# Altium PCB OUTDATED - motordriver-v6.3.PcbDoc (part 2 of 2)
Units mil, origin at the board's own origin, x right, y up, seen from the top; angles counter-clockwise.
Board outline 1181.1 x 2362.2 mil, 4 copper layers (TOP, GND, POWER, BOT), stack 23.756 mil thick; 171 components, 78 nets, 481 pads, 238 vias.
Unrouted connection lines stored in the file: 109.
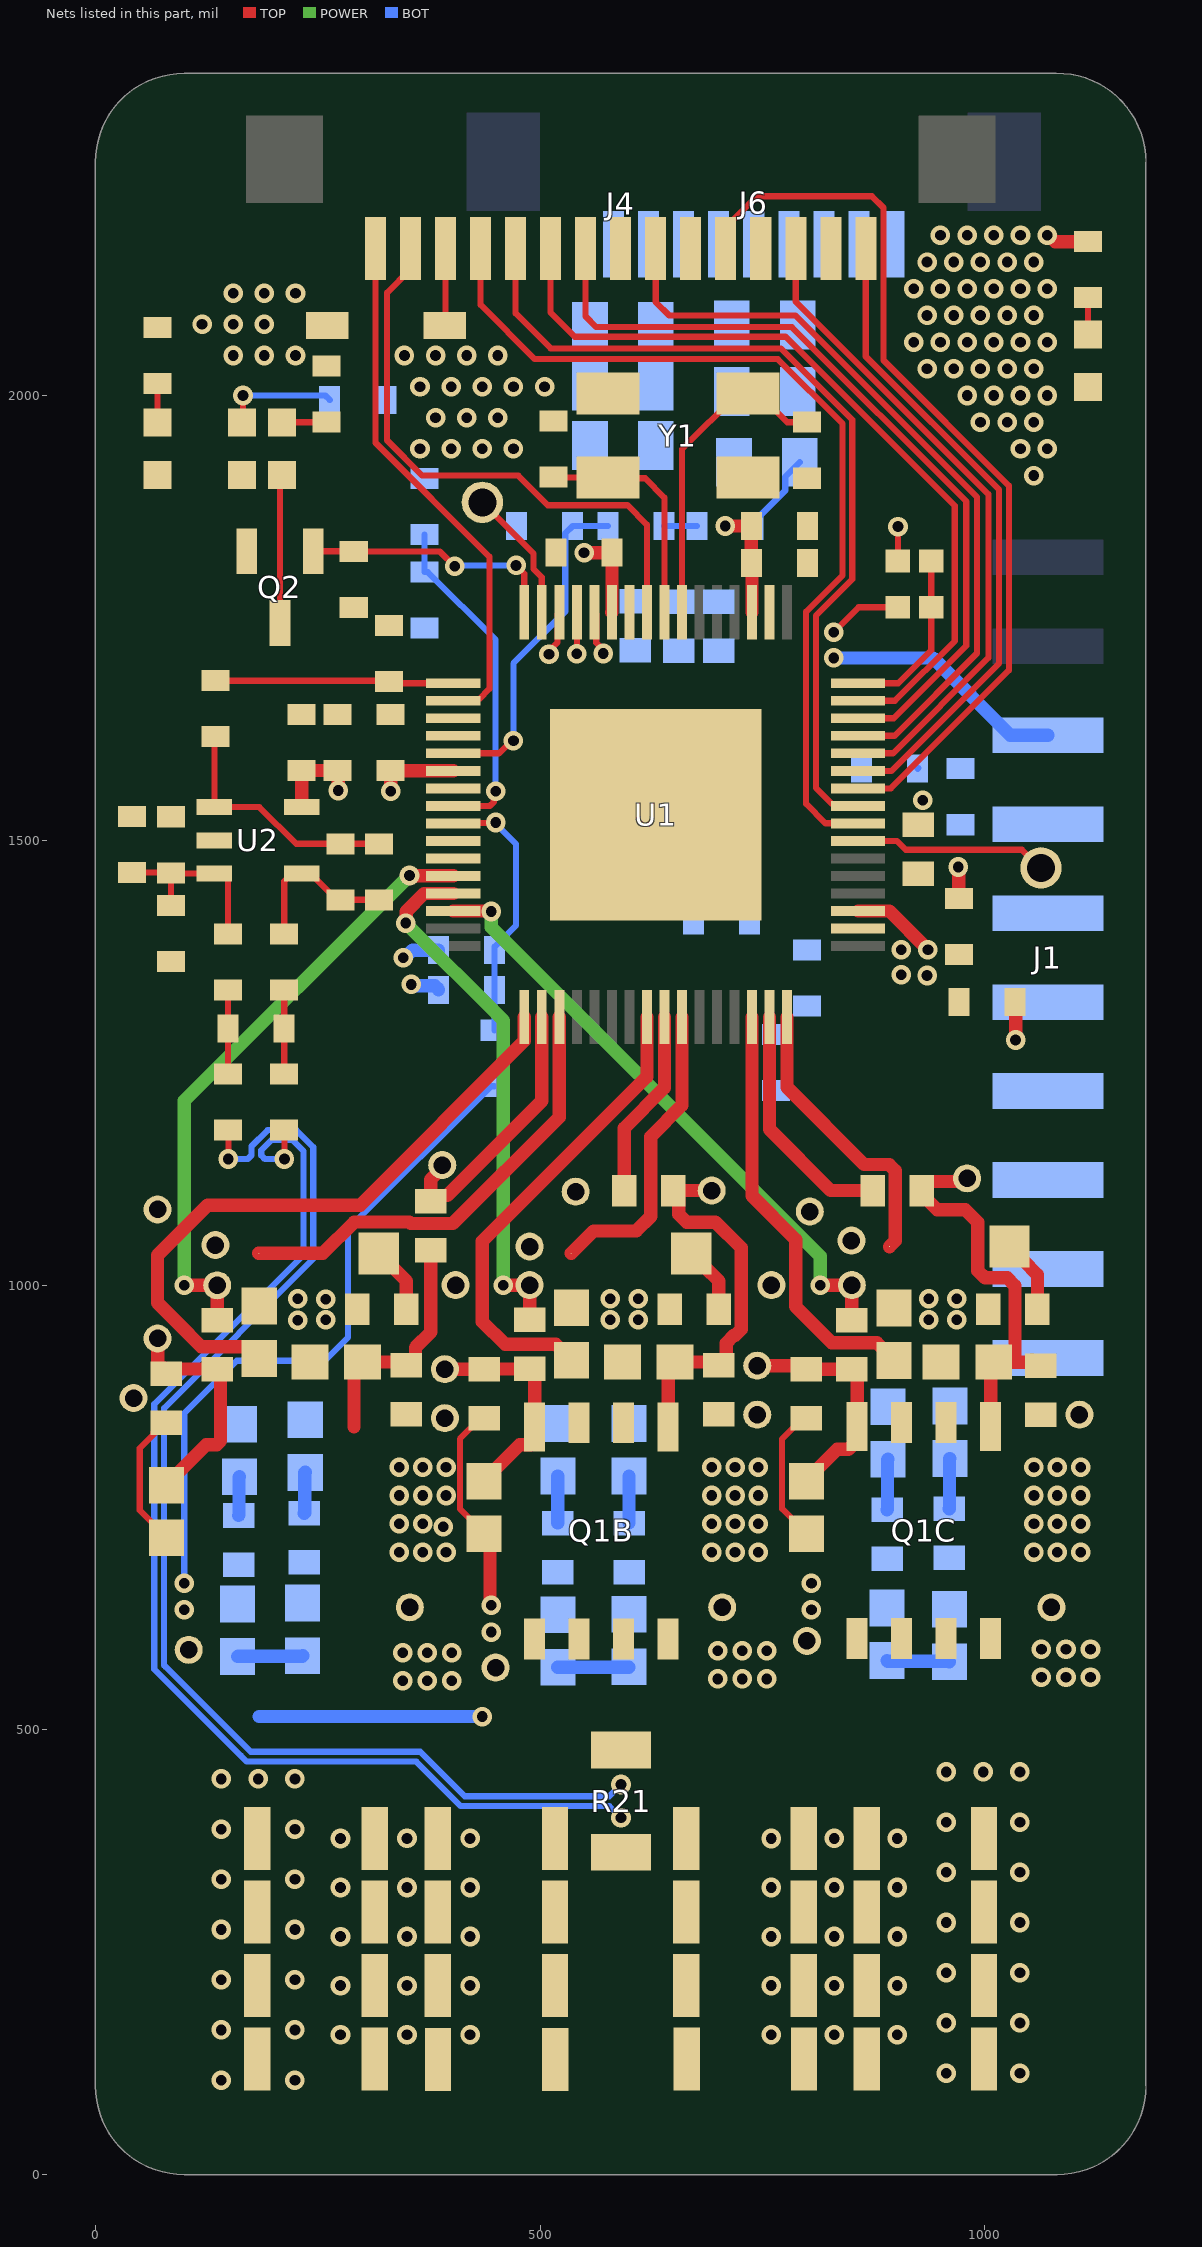
[diagram p4: the nets of this part, all layers, seen from the top]

## Part data (continued)
R20 R27: library part CMP-009-00004-5, "Chip Resistor, 0 Ohm, 0.063 W, -55 to 155 degC, 0402 (1005 Metric)", Case/Package=0402, Max Operating Temperature=155°C, Min Operating Temperature=-55°C, Power=63mW, Voltage Rating=50V, Mounting Technology=SM, Pins=2, RoHS Compliant=True
R21: "1W 0.015 OHM METAL ALLOY CS 1% C 1206", Supplier Part Number 1=273-MCS1632R015DERCT-ND, ComponentLink1Description="New link", ComponentLink1URL=https://www.digikey.ca/en/products/detail/ohmite/MCS1632R015DER/22672431, Supplier 1=Digikey
R23: library part "RES 17.2k 1/10W 0.1%", "RES 17.2k OHM 0.1% 1/10W 0603", Package=0603, Power (Watts)=0.125W, Supplier Part Number 1=2019-RN73H1JTTD1722B25CT-ND, Tolerance=1%, Supplier 1=Digikey
R24: library part "RES 2k 1/8W", "Default Resistor Symbol", Package=0805, Power (Watts)=0.125W, Tolerance=5%, Part Number="RES 2k 1/8W"
R25: library part "RES 47k 1/8W - 1%", "Default Resistor Symbol", Manufacturer Part Number 1=MCT06030C4702FP500, Package=0805, Power (Watts)=0.125W, Supplier Part Number 1=MCT0603-47.0K-CFCT-ND, Tolerance=1%, Part Number="RES 47k 1/8W - 1%", Supplier 1=Digi-Key, Supplier URL 1=https://www.digikey.ca/en/products/detail/vishay-beyschlag-draloric-bc-components/MCT06030C4702FP500/2607854?s=N4IgTCBcDaILIGEAqAGAbCgzAWgCwHYA6FAaWwQDFlsA5AERAF0BfIA
R26A R26B R26C R30A R30B R30C R34A R34B R34C: library part CMP-009-00398-1, "SMD Chip Resistor, 10 Ohm, ± 1%, 250 mW, 0603 [1608 Metric], Thick Film, Anti-Surge", Case/Package=0603, Power=250mW, Pins=2
R33A R33B R33C R36A R36B R36C: library part CMP-009-00395-2, "Fixed Resistor, Metal Glaze/thick Film, 0.1W, 100000ohm, 75V, 1% +/-Tol, 100ppm/Cel, Surface Mount, 0603", Case/Package=0603, Max Operating Temperature=155°C, Min Operating Temperature=-55°C, Power=100mW, Tolerance=1%, Mounting Technology="Surface Mount", Pins=2, RoHS Compliant=Yes
R37: library part CMP-009-00399-1, "Fixed Resistor, Metal Glaze/thick Film, 0.1W, 0ohm, Surface Mount, 0603", Case/Package=0603, Max Operating Temperature=155°C, Min Operating Temperature=-55°C, Power=100mW, Mounting Technology="Surface Mount", Pins=2, RoHS Compliant=Yes
R38: library part "RES 10k 1/8W - 1%", "Default Resistor Symbol", Manufacturer Part Number 1=ERJ-H3GJ103V, Manufacturer Part Number 2=RMCF0805JT10K0, Package=0805, Power (Watts)=0.125W, Supplier Part Number 1=10-ERJ-H3GJ103VCT-ND, Tolerance=5%, Part Number="RES 10k 1/8W - 1%", Supplier 1=Digi-Key, Supplier 2=Digi-Key, Supplier Part Number 2=RMCF0805JT10K0CT-ND, Supplier URL 1=https://www.digikey.ca/en/products/detail/panasonic-electronic-components/ERJ-H3GJ103V/13877876?s=N4IgTCBcDaIIwAYC0BRASgKSQCQMwHENFcA1AYQBUkA5AERAF0BfIA, Supplier URL 2=https://www.digikey.ca/en/products/detail/stackpole-electronics-inc/RMCF0805JT10K0/1757762?s=N4IgTCBcDaIEoFkDCAxADADjQVgFIBUBGNAaTSXxAF0BfIA, Tolerance 2=5%
R39 R40: library part "RES 470k 1/8W", "Default Resistor Symbol", Package=0805, Power (Watts)=0.125W, Tolerance=5%, Part Number="RES 470k 1/8W"
R41: library part "RES 68k 1/8W", "Default Resistor Symbol", Package=0805, Power (Watts)=0.125W, Tolerance=5%, Part Number="RES 68k 1/8W"
U1: "No Description Available", Mfr_Name=STMicroelectronics, RefDes=RefDes, Type=Type
U2: "IC OPAMP VFB 1 CIRCUIT SOT23-5", Manufacturer="Analog Devices", Manufacturer Part Number=ADA4505-1ARJZ-R7, Max Operating Temperature=125°C, Supplier Part Number 1=595-OPA356AIDBVR, Category="Amplifiers - Op Amps, Buffer, Instrumentation", ComponentLink1Description=https://datasheet.ciiva.com/22712/1610797-22712032.pdf?src-supplier=Element14, ComponentLink1URL=https://datasheet.ciiva.com/22712/1610797-22712032.pdf?src-supplier=Element14, ComponentLink2Description=https://datasheet.ciiva.com/23805/608874-23805844.pdf?src-supplier=Newark, ComponentLink2URL=https://datasheet.ciiva.com/23805/608874-23805844.pdf?src-supplier=Newark, ComponentLink3Description=https://datasheet.ciiva.com/1487/1610797-1487372.pdf?src-supplier=Element14, ComponentLink3URL=https://datasheet.ciiva.com/1487/1610797-1487372.pdf?src-supplier=Element14, Digikey=ADA4505-1ARJZ-R7CT-ND, Number of Pins=5, REACH SVHC="No SVHC", RoHS=Yes, Supplier 1=Mouser
Y1: "8 MHz Â±10ppm Crystal 10pF 200 Ohms 4-SMD, No Lead", Package="SMD-4 Abracon LLC", Availability="In Stock", Check_prices=https://www.snapeda.com/parts/ABM3B-8.000MHZ-10-1-U-T/Abracon+LLC/view-part/?ref=eda, MF=Abracon, MP=ABM3B-8.000MHZ-10-1-U-T, Price=None, Purchase-URL=https://pricing.snapeda.com/search/part/ABM3B-8.000MHZ-10-1-U-T/?ref=eda, SnapEDA_Link=https://www.snapeda.com/parts/ABM3B-8.000MHZ-10-1-U-T/Abracon+LLC/view-part/?ref=snap
PA3 PA12: Part Number="Test Point (Via)"

## Free pads (board coordinates)
  round 31.5 hole 19.68: 3(43,873) 3(70,940) 3(70,1085) 3(105,590) 3(135,1045) 3(137.05,999.75) 3(353.58,637.8) 3(390,1135) 3(392.95,850.39) 3(392.95,905.51) 3(405,1000) 3(450,570) 3(488.19,1000) 3(488.19,1043.31) 3(540,1105) 3(692.91,1106.3) 3(704.72,637.8) 3(744.09,854.33) 3(744.09,909.45) 3(760,1000) 3(800,600) 3(803.15,1082.68) 3(850,1050) 3(850.39,1000) 3(980,1120) 3(1074.8,637.8) 3(1106.3,854.33)

## Via types
v1: diameter 22, hole 12, TOP to BOT, tented both sides, 169 vias
v2: diameter 22, hole 12, TOP to BOT, 67 vias
v3: diameter 118.11, hole 94.49, TOP to BOT, 2 vias

## Nets (pads, with @x,y where several pads share a name; then routed paths per layer and width w, separated by ;. In a path a pad name is that pad's centre, name@x,y a point inside that pad or via, vN(x,y) a via of type N, cw(c..) or ccw(c..) an arc to the next point about the centre after c; other vN are vias at no path point)
BOOT0: R20.1 R27.1 U1.64 | length 186
  TOP w7: U1.64@857.42,1676.5 902.5,1676.5 939.7,1713.7 R20.1@939.7,1762 R27.1@939.7,1802
BOOTA: BOOTA.1 C47A.2 D9A.1 pad.3@135,1045 U1.35 | length 515.2
  TOP w15: D9A.1@183.78,1035.68 255.68,1035.68 290.87,1070.87 353.07,1070.87 354.72,1069.21 402,1069.21 521.65,1188.86 U1.35@521.65,1301.36
BOOTB: BOOTB.1 C47B.2 D9B.1 pad.3@488.19,1043.31 U1.42 | length 345.4
  TOP w15: D9B.1@534.92,1035.69 560.13,1060.89 608.14,1060.89 624.33,1077.08 624.33,1166.95 659.45,1202.07 U1.42@659.45,1301.36
BOOTC: BOOTC.1 C47C.2 D9C.1 pad.3@850,1050 U1.48 | length 327.7
  TOP w15: U1.48@777.56,1301.36 777.56,1222.44 864.48,1135.52 892.56,1135.52 899.3,1128.78 899.3,1049.93 D9C.1@892.68,1043.31
CIN: C19.2 R23.2 R24.2 U1.25 | length 301
  TOP w7: U1.25@402.42,1519.02 402.91,1519.51 449.51,1519.51 v1(450,1520)
  BOT w7: R24.2@448.82,1286.5 C19.2@448.82,1331.79 448.82,1380.43 473,1404.62 473,1495.59 450,1518.59 v1(450,1520)
CRYSTAL_F0: C13.2 U1.7 Y1.1 | length 363.2
  TOP w7: U1.7@659.45,1756.36 659.45,1939.76 721.93,2002.24 Y1.1@733.74,2002.24 745.55,2002.24 777.8,1970 C13.2@800,1970
CRYSTAL_F1: C14.2 U1.8 Y1.3 | length 266
  TOP w7: C14.2@515,1915 522.24,1907.76 Y1.3@576.26,1907.76 577.11,1906.91 618.09,1906.91 639.76,1885.24 U1.8@639.76,1756.36
CURR_FB: C16.2 C_FB.1 R17.2 U1.17 | length 268.7
  TOP w7: R17.2@135,1679.5 329.01,1679.5 332.01,1676.5 U1.17@402.42,1676.5
ENC_A_MCU: C7.2 R4.2 U1.12 | length 51.6
  TOP w7: U1.12@561.02,1756.36 563.02,1754.36 563.02,1722.04 571,1714.06 v1(571,1710)
  BOT w7: C7.2@924.43,1580.49 C7.2@925.22,1581.28
ENC_B_MCU: C8.2 R5.2 U1.13 | length 46.7
  TOP w7: v1(541.34,1709.66) U1.13@541.34,1756.36
ENC_N_MCU: C9.2 R6.2 U1.14 | length 52.2
  TOP w7: v1(510,1709) 510,1713.06 519.65,1722.71 519.65,1754.36 U1.14@521.65,1756.36
GND: C1.1 C2.1 C3.1 C4.1 C5.1 C6.1 C7.1 C8.1 C9.1 C10.2 C11.1 C12.1 C13.1 C14.1 C16.1 C17.1 C19.1 C20.1 C21.1 C22.1 C23.1 C24.1 C25.1 C29.1 C30.1 C31.1 C32.1 C33.1 C34.1 C35.1 C36.1 C37.1 C38.1 C39.1 C40.1 C41.1 C42.1 C43.1 C44.1 D1.2 D2.2 D3.2 J1.7 J4.02 J4.04 J4.06 J4.08 J6.2 J6.3 J6.4 J6.5 J?.5 J?.6 J?.7 J?.8 J?.11 J?.13 J?.15 J?.17 pad.3@43,873 pad.3@70,1085 pad.3@405,1000 pad.3@540,1105 pad.3@760,1000 pad.3@803.15,1082.68 Q2.2 R12.1 R21.2 R27.2 R37.2 R38.1 R41.1 TP1.1 TP2.1 TP3.1 TP4.1 TP5.1 TP6.1 TP7.1 TP8.1 TP9.1 TP12.1 U1.2 U1.10 U1.23 U1.26 U1.27 U1.EPAD U2.2 Y1.2 Y1.4 | length 152.2
  TOP w7: C13.1@799.25,1907.76 C13.1@800,1907.01 ; R27.2@902.3,1814 v1(902.3,1852.7)
  TOP w15: v1(970,1470) 970.5,1469.5 970.5,1435 C6.1@971,1434.5 ; C5.1@1033.99,1318.11 1034.5,1317.61 v1(1034.5,1275.5)
  BOT w15: v1(355,1338) 356.34,1336.66 381.52,1336.66 385.83,1332.35 C19.1@385.83,1331.79
  other v1: 141.73,106.29 224.41,106.29 956.69,114.17 1039.37,114.17 141.73,162.72 224.41,162.72 956.69,170.6 1039.37,170.6 141.73,219.15 224.41,219.15 956.69,227.04 1039.37,227.04 141.73,275.59 224.41,275.59 956.69,283.47 1039.37,283.47 141.73,332.02 224.41,332.02 956.69,339.9 1039.37,339.9 141.73,388.45 224.41,388.45 956.69,396.33 1039.37,396.33 141.73,444.88 183.07,444.88 224.41,444.88 956.69,452.76 998.03,452.76 1039.37,452.76 930,1545
GPIO_PA4: Q2.1 R38.2 U1.16 | length 291.9
  TOP w7: Q2.1@245,1825 290.15,1825 R38.2@290.52,1824.64 387.36,1824.64 v1(404,1808) ; v1(473,1809) 482.28,1799.72 U1.16@482.28,1756.36
  BOT w7: v1(404,1808) 405,1809 v1(473,1809)
GPIO_PA7: U1.19
GPIO_PB0: U1.20
HALL_1: J1.4 R1.1 R4.1
HALL_2: J1.5 R2.1 R5.1
HALL_E: J1.6 R3.1 R6.1
HGA: C48A.2 HGA.1 Q1A.1 R30A.2 R33A.2 | length 271.1
  TOP w15: 290.79,840.75 290.79,903.99 C48A.2@300.43,913.64 345.71,913.64 R33A.2@349.65,909.7 353.58,909.7 359.86,915.98 359.86,929.86 377.2,947.2 R30A.2@377.2,1039.37
HGB: C48B.2 HGB.1 pad.3@692.91,1106.3 Q1B.1 R30B.2 R33B.2 | length 430.1
  TOP w15: Q1B.1@643.9,840.75 643.9,905.96 C48B.2@651.57,913.64 696.85,913.64 R33B.2@700.79,909.7 702.83,909.7 709.11,915.98 709.11,934.69 717.9,943.48 719.33,943.48 726.07,950.21 726.07,1041.94 697.2,1070.81 664.67,1070.81 655.89,1079.59 655.89,1100.02 R30B.2@649.61,1106.3 655.89,1106.3 pad.3@692.91,1106.3
HGC: C48C.2 HGC.1 pad.3@980,1120 Q1C.1 R30C.2 R33C.2 | length 456.2
  TOP w15: R30C.2@929.07,1102.43 935.41,1096.08 935.41,1095.82 946.43,1084.81 977.88,1084.81 992.13,1070.56 992.13,1016.22 1000.16,1008.19 1024.99,1008.19 1033.78,999.4 1033.78,913.39 ; R30C.2@929.13,1106.3 929.13,1110.24 935.41,1116.52 972.05,1116.52 975.54,1120 pad.3@980,1120 ; Q1C.1@1006.5,840.94 1006.5,910.04 C48C.2@1009.84,913.39 1033.78,913.39 ; R33C.2@1052.78,915.73 R33C.2@1055.12,913.39 ; R33C.2@1062.99,909.45 1059.06,913.39 R33C.2@1055.12,913.39 ; 1033.78,913.39 R33C.2@1055.12,913.39
HV: C23.2 C24.2 C25.2 C29.2 C30.2 C31.2 C32.2 C33.2 C34.2 C35.2 C36.2 C37.2 C38.2 C39.2 C40.2 C41.2 C42.2 C43.2 C44.2 C46A.2 C46B.2 C46C.2 J6.6 J6.7 J6.8 J6.9 J?.1 J?.2 J?.3 J?.4 pad.3@353.58,637.8 pad.3@704.72,637.8 pad.3@1074.8,637.8 Q1A.7 Q1A.7,8 Q1A.8 Q1B.7 Q1B.8 Q1C.7 Q1C.8 R16.2 R28A.2 R28B.2 R28C.2 R39.1 TP10A.1 TP10B.1 TP10C.1 TP11.1 | length 142.3
  TOP w15: v2(1070,2180) 1071.89,2180 1078.9,2172.99 R16.2@1116,2172.99
  BOT w7: R39.1@739.5,1853.31 739.5,1857.25 775.5,1893.26 775.5,1908.5 C25.2@792,1925
  other v1: 275.59,157.47 350.39,157.48 421.26,157.48 759.84,157.47 830.71,157.48 901.57,157.48 275.59,212.59 350.39,212.6 421.26,212.6 759.84,212.59 830.71,212.6 901.57,212.6 275.59,267.71 350.39,267.72 421.26,267.72 759.84,267.71 830.71,267.72 901.57,267.72 275.59,322.83 350.39,322.84 421.26,322.84 759.84,322.83 830.71,322.84 901.57,322.84 275.59,377.95 350.39,377.96 421.26,377.96 759.84,377.95 830.71,377.96 901.57,377.96 345.71,555.12 373.27,555.12 400.83,555.12 699.6,557.3 727.16,557.3 754.72,557.3 1063.58,559.06 1091.14,559.06 1118.7,559.06 345.71,586.61 373.27,586.61 400.83,586.61 699.6,588.8 727.16,588.8 754.72,588.8 1063.58,590.55 1091.14,590.55 1118.7,590.55
  other v2: 1055,1910 1040,1940 1070,1940 995,1970 1025,1970 1055,1970 980,2000 1010,2000 1040,2000 1070,2000 935,2030 965,2030 995,2030 1025,2030 1055,2030 920,2060 950,2060 980,2060 1010,2060 1040,2060 1070,2060 935,2090 965,2090 995,2090 1025,2090 1055,2090 920,2120 950,2120 980,2120 1010,2120 1040,2120 1070,2120 935,2150 965,2150 995,2150 1025,2150 1055,2150 950,2180 980,2180 1010,2180 1040,2180
HVGA: HVGA.1 pad.3@390,1135 R30A.1 U1.34 | length 298.7
  TOP w15: R30A.1@379.72,1094.49 R30A.1@377.2,1094.49 377.2,1118.77 390,1131.56 pad.3@390,1135 ; R30A.1@390,1100.77 395.77,1100.77 501.97,1206.97 U1.34@501.97,1301.36
HVGB: HVGB.1 R30B.1 U1.41 | length 213.8
  TOP w15: R30B.1@594.49,1106.3 594.49,1176.55 639.76,1221.83 U1.41@639.76,1301.36
HVGC: HVGC.1 R30C.1 U1.47 | length 270.8
  TOP w15: U1.47@757.87,1301.36 757.87,1175.2 826.77,1106.3 R30C.1@874.02,1106.3
LGA: C51A.2 LGA.1 pad.3@70,940 Q1A.4 R34A.2 R36A.2 | length 255
  TOP w15: pad.3@70,940 70,906.4 R36A.2@80,900.12 79.03,903.99 R36A.2@78.43,906.4 ; R36A.2@86.12,905.76 137.05,905.76 140.79,902.02 140.79,825 136.48,820.69 124.7,820.69 92.19,788.17 C51A.2@86.21,788.17
LGB: C51B.2 LGB.1 pad.3@392.95,905.51 Q1B.4 R34B.2 R36B.2 | length 269.8
  TOP w15: pad.3@392.95,905.51 R36B.2@452.01,905.51 ; C51B.2@437.01,779.53 437.01,780.51 477.18,820.69 489.59,820.69 493.9,825 493.9,900.05 R34B.2@488.19,905.76 437.26,905.76 R36B.2@437.01,905.51
LGC: C51C.2 LGC.1 pad.3@744.09,909.45 Q1C.4 R34C.2 R36C.2 | length 267.6
  TOP w15: pad.3@744.09,909.45 795.28,909.45 R36C.2@799.21,905.51 R34C.2@850.39,905.51 856.5,899.41 Q1C.4@856.5,840.94 856.5,825.2 846.69,815.39 834.09,815.39 799.21,780.51 C51C.2@799.21,779.53
LVGA: LVGA.1 pad.3@137.05,999.75 R34A.1 U1.28 | length 681.8
  TOP w15: v1@108.43,999.81 136.98,999.81 pad.3@137.05,999.75 R34A.1@137.05,960.63 ; v1(353.15,1460.41) 353.56,1460 U1.28@402.42,1459.96 U1.28@402.42,1459.96
  POWER w15: v1(100,1000) 100,1207.26 v1@352.63,1459.89
LVGB: LVGB.1 pad.3@488.19,1000 R34B.1 U1.29 | length 595.7
  TOP w15: v1(349,1407) 349.52,1407.52 349.52,1419.95 369.84,1440.28 U1.29@402.42,1440.28 ; v1(458.5,1000) pad.3@488.19,1000 R34B.1@488.19,960.88
  POWER w15: v1(349,1407) 458.5,1297.5 v1(458.5,1000)
LVGC: LVGC.1 pad.3@850.39,1000 R34C.1 U1.30 | length 690.1
  TOP w15: U1.30@402.42,1420.59 443.67,1420.59 443.75,1420.52 444.34,1420.52 v1@444.41,1420.59 ; v1(814.96,1000) pad.3@850.39,1000 R34C.1@850.39,960.63
  POWER w15: v1(445,1420) 445,1402.29 791.86,1055.43 814.96,1032.33 v1(814.96,1000)
MD_ENABLE: J4.15 J?.24 U1.18 | length 594.2
  TOP w7: J4.15@314.96,2165.35 314.96,1946.91 443,1818.87 443,1670.47 431.34,1658.81 404.42,1658.81 U1.18@402.42,1656.81
NetC15_1: C15.1 R18.1 R19.2 | length 94.5
  TOP w7: R19.2@212.28,1237.3 C15.1@212.28,1288.48 R18.1@212.28,1331.79
NetC15_2: C15.2 R14.1 R15.2 | length 94.5
  TOP w7: R15.2@149.29,1237.3 C15.2@149.29,1288.48 R14.1@149.29,1331.79
NetC18_1: C18.1 R17.1 R22.2 U2.1 | length 281.7
  TOP w7: R17.1@135,1616.5 133.86,1615.36 U2.1@133.86,1537.4 184.43,1537.4 225.77,1496.06 C18.1@318.9,1496.06
NetC20_2: C20.2 R25.1 U1.24 | length 384.1
  TOP w7: U1.24@402.42,1538.7 443.7,1538.7 447.95,1542.95 447.95,1552.95 v1(450,1555)
  BOT w7: R25.1@370,1843.5 C20.2@370,1801.5 373.94,1801.5 450,1725.43 v1(450,1555)
NetC45A_2: C45A.2 R28A.1 | length 46.3
  BOT w15: R28A.1@235,743.56 235.5,744.06 235.5,788.97 C45A.2@236,789.47
NetC45B_2: C45B.2 R28B.1 | length 52.9
  BOT w15: R28B.1@600,732.56 C45B.2@600,785.47
NetC45C_2: C45C.2 R28C.1 | length 56.6
  BOT w15: R28C.1@960,748.7 960.26,748.96 960.26,804.82 C45C.2@960.51,805.08
NetC46A_1: C46A.1 C49A.2 | length 73.4
  BOT w15: C49A.2@160,582.47 160.5,582.97 232.5,582.97 C46A.1@233,583.47
NetC46B_1: C46B.1 C49B.2 | length 80.2
  BOT w7: C46B.1@599.53,570.47 C46B.1@600,570.94
  BOT w15: C49B.2@520,570.47 C46B.1@599.53,570.47
NetC46C_1: C46C.1 C49C.2 | length 70.6
  BOT w15: C49C.2@890,578.03 890.71,577.32 959.29,577.32 C46C.1@960,576.61
NetC50A_1: C50A.1 R35A.2 | length 43.9
  BOT w15: R35A.2@161,741 161.5,741.5 161.5,783.97 C50A.1@162,784.47
NetC50B_1: C50B.1 R35B.2 | length 52.9
  BOT w15: R35B.2@520,732.56 C50B.1@520,785.47
NetC50C_1: C50C.1 R35C.2 | length 57
  BOT w15: R35C.2@890,747.56 890.51,748.07 890.51,803.62 C50C.1@891.02,804.13
NetD1_1: D1.1 R11.1 | length 44
  TOP w7: D1.1@70,1969.53 R11.1@70,2013.5
NetD2_1: D2.1 R13.1 | length 130.5
  TOP w7: D2.1@165,1969.53 166,1970.53 v1(166,2000)
  BOT w7: v1(166,2000) 258.5,2000 R13.1@263.5,1995
NetD3_1: D3.1 R16.1 | length 41.5
  TOP w7: D3.1@1116,2068.53 R16.1@1116,2110
NetD6_1: D6.1 R32.1 | length 50.2
  TOP w7: D6.1@210,1969.53 210.47,1970 R32.1@260,1970
NetD6_2: D6.2 Q2.3 | length 167.2
  TOP w7: Q2.3@207.6,1744.29 207.6,1908.07 D6.2@210,1910.47
NetD9A_2: D9A.2 R26A.1 | length 76.4
  TOP w15: D9A.2@318.66,1035.68 318.66,1034.7 333.8,1019.56 334.78,1019.56 349.65,1004.7 R26A.1@349.65,972.69
NetD9B_2: D9B.2 R26B.1 | length 76.4
  TOP w15: D9B.2@669.8,1035.69 669.8,1034.7 684.94,1019.56 685.93,1019.56 700.79,1004.7 R26B.1@700.79,972.69
NetD9C_2: D9C.2 R26C.1 | length 84.2
  TOP w15: D9C.2@1027.56,1043.31 1027.56,1042.32 1042.7,1027.19 1043.68,1027.19 1059.06,1011.81 R26C.1@1059.06,972.69
NetPA3_1: PA3.1 U1.15 | length 151.4
  TOP w7: PA3.1@435,1880 492.5,1822.5 492.5,1805.06 501.88,1795.68 501.88,1756.45 U1.15@501.97,1756.36
NetPA12_1: PA12.1 U1.55 | length 218.1
  TOP w7: U1.55@857.42,1499.33 901.13,1499.33 910.96,1489.5 1041.57,1489.5 1062.07,1469 PA12.1@1063,1469
NetR37_1: R37.1 U1.50
NetR39_2: R39.2 R40.1 | length 37.1
  BOT w7: R40.1@639.37,1853.31 R39.2@676.5,1853.31
NRST: J4.14 J?.23 U1.9 | length 656.6
  TOP w7: J4.14@354.33,2165.35 354.33,2141.73 328,2115.4 328,1949.42 367.42,1910 475.34,1910 508.7,1876.63 598.37,1876.63 620.08,1854.92 U1.9@620.08,1756.36
OUTA: C45A.1 C47A.1 C48A.1 C50A.2 J1.8 OUT1A.1 pad.3@392.95,850.39 Q1A.2 Q1A.2,3 Q1A.3 R33A.1 U1.33 | length 733.5
  TOP w15: C47A.1@184.29,917.57 184.29,918.56 172.11,930.74 159.57,930.74 159.53,930.79 119.21,930.79 114.65,935.35 114.57,935.35 97.46,952.46 69.87,980.05 69.87,1033.6 126.13,1089.87 297.64,1089.87 482.28,1274.51 U1.33@482.28,1301.36
  other v1: 341.77,699.8 368.02,699.8 394.27,699.8 391.09,728.45 341.77,731.63 368.02,731.63 341.77,763.45 368.02,763.45 394.27,763.45 341.77,795.28 368.02,795.28 394.27,795.28
OUTB: C45B.1 C47B.1 C48B.1 C50B.2 J1.9 OUT1B.1 pad.3@744.09,854.33 Q1B.2 Q1B.3 R33B.1 U1.40 | length 537.5
  TOP w15: C47B.1@535.43,915.61 517.75,933.32 460.63,933.32 435,958.95 435,1049.17 620.08,1234.25 U1.40@620.08,1301.36
  other v1: 692.91,699.8 719.16,699.8 745.41,699.8 692.91,731.63 719.16,731.63 745.41,731.63 692.91,763.45 719.16,763.45 745.41,763.45 692.91,795.28 719.16,795.28 745.41,795.28
OUTC: C45C.1 C47C.1 C48C.1 C50C.2 J1.10 OUT1C.1 pad.3@1106.3,854.33 Q1C.2 Q1C.3 R33C.1 U1.46 | length 481.8
  TOP w15: U1.46@738.19,1301.36 738.19,1100.39 787.4,1051.18 787.4,975.86 827.91,935.35 878.63,935.35 897.64,916.34 C47C.1@897.64,915.35
  other v1: 1055.12,699.8 1081.36,699.8 1107.61,699.8 1055.12,731.63 1081.36,731.63 1107.61,731.63 1055.12,763.45 1081.36,763.45 1107.61,763.45 1055.12,795.28 1081.36,795.28 1107.61,795.28
SENSE: C49A.1 C49B.1 C49C.1 C51A.1 C51B.1 C51C.1 pad.3@105,590 pad.3@450,570 pad.3@800,600 Q1A.5 Q1A.5,6 Q1A.6 Q1B.5 Q1B.6 Q1C.5 Q1C.6 R21.1 R24.1 R35A.1 R35B.1 R35C.1 R36A.1 R36B.1 R36C.1 SENSE1A.1 SENSE1B.1 SENSE1C.1 | length 1563.5
  TOP w7: C51A.1@80,715.94 80,716.93 50,746.93 50,816.62 54.1,820.72 65.78,832.4 65.78,834.72 76.06,845 R36A.1@80,845 ; C51B.1@437.01,720.47 437.01,721.46 409.82,748.64 409.82,827.15 433.07,850.39 R36B.1@437.01,850.39 ; C51C.1@799.21,720.47 799.21,721.46 772.03,748.64 772.03,827.15 795.28,850.39 R36C.1@799.21,850.39
  TOP w15: C51B.1@437.01,720.47 443.66,713.82 443.66,641.34 v1(445,640)
  BOT w7: v1(100,665) 100,856 159,915 258,915 284,941 284,1062.62 444.88,1223.5 R24.1@448.82,1223.5
  BOT w15: 184.27,515 v1(435,515)
  other v1: 445,610 100,635 805,635 805,665
SENSE_F_N: C18.2 R18.2 R22.1 U2.4 | length 176.6
  TOP w7: R18.2@212.28,1394.78 212.28,1454.02 220.86,1462.6 U2.4@231.86,1462.6 ; U2.4@237.36,1462.6 242.86,1462.6 248.36,1457.1 248.36,1456.37 271.65,1433.07 R22.1@275.59,1433.07 C18.2@318.9,1433.07
SENSE_F_P: C10.1 R7.2 R12.2 R14.2 U2.3 | length 210.2
  TOP w7: R12.2@41.14,1463.77 84.73,1463.77 R7.2@85,1463.5 ; C10.1@85,1426.5 R7.2@85,1463.5 ; R14.2@149.29,1394.78 149.29,1457.1 143.79,1462.6 U2.3@133.86,1462.6 85.91,1462.6 R7.2@85,1463.5
SENSE_N: R19.1 R21.S2 S_N.1 | length 1369.6
  TOP w7: R19.1@212.28,1174.31 212.6,1173.99 v1(212.6,1141.73)
  BOT w7: v1(212.6,1141.73) 190.7,1141.73 186.6,1145.83 186.6,1151.63 198.2,1163.23 221.5,1163.23 234.1,1150.64 234.1,1034.14 66.25,866.29 66.25,568.2 67.97,566.47 163.62,470.83 170.06,464.38 360.79,464.38 410.79,414.38 577.69,414.38 v1(590.94,401.13)
SENSE_P: R15.1 R21.S1 S_P.1 | length 1387.8
  TOP w7: R15.1@149.29,1174.31 149.61,1173.99 v1(149.61,1141.73)
  BOT w7: v1(149.61,1141.73) 171.5,1141.73 175.6,1145.83 175.6,1156.19 193.65,1174.23 226.06,1174.23 245.1,1155.19 245.1,1029.58 77.25,861.73 77.25,572.75 78.97,571.03 174.62,475.38 365.34,475.38 415.34,425.38 577.69,425.38 v1(590.94,438.63)
SPI_CLK: J4.07 J?.16 U1.61 | length 860
  TOP w7: J4.07@629.92,2165.35 629.92,2105.08 644.92,2090.08 786.92,2090.08 991,1886 991,1710 898.44,1617.44 U1.61@857.42,1617.44
SPI_CS: J4.05 J?.14 U1.58 | length 1023.8
  TOP w7: J4.05@708.66,2165.35 708.66,2188.98 743.69,2224 873,2224 886,2211 886,2039.56 1027,1898.56 1027,1691 894.39,1558.39 U1.58@857.42,1558.39
SPI_MISO: J4.01 J?.10 U1.59 | length 737.1
  TOP w7: U1.59@857.42,1578.07 895.07,1578.07 1016,1699 1016,1894 866.14,2043.86 J4.01@866.14,2165.35
SPI_MOSI: J4.03 J?.12 U1.60 | length 741.1
  TOP w7: J4.03@787.4,2165.35 787.4,2105.6 1004,1889 1004,1705 896.76,1597.76 U1.60@857.42,1597.76
SWD_CLK: J4.11 J?.20 U1.57 | length 987.4
  TOP w7: J4.11@472.44,2165.35 472.44,2092.56 512,2053 770.72,2053 851,1972.72 851,1793.5 810,1752.5 810,1559.2 828.5,1540.7 855.42,1540.7 U1.57@857.42,1538.7
SWD_IO: J4.12 J?.21 U1.56 | length 1037.4
  TOP w7: J4.12@433.07,2165.35 433.07,2101.93 494,2041 767.17,2041 840,1968.17 840,1798.06 799,1757.06 799,1541 820.78,1519.22 857.22,1519.22 U1.56@857.42,1519.02
UART_RX: J4.10 J?.19 U1.63 | length 904.7
  TOP w7: J4.10@511.81,2165.35 511.81,2093.19 539,2066 776,2066 966,1876 966,1724 898.81,1656.81 U1.63@857.42,1656.81
UART_TX: J4.09 J?.18 U1.62 | length 908.1
  TOP w7: J4.09@551.18,2165.35 551.18,2088.82 563,2077 783,2077 979,1881 979,1718.67 897.46,1637.13 U1.62@857.42,1637.13
VBUS_FDBK: R40.2 R41.2 U1.21 | length 382.1
  TOP w7: U1.21@402.42,1597.76 453.86,1597.76 468.13,1612.03 v1(470,1612.03)
  BOT w7: v1(470,1612.03) 470,1698.87 528.32,1757.19 528.32,1845 R41.2@536.63,1853.31 R40.2@576.38,1853.31
VCC: C5.2 C6.2 C17.2 C21.2 C22.2 J6.1 J?.9 R13.2 R25.2 R26A.2 R26B.2 R26C.2 U1.51 | length 96.6
  TOP w15: U1.51@857.42,1420.59 892.41,1420.59 v1(936,1377)
  other v1: 227.6,960.63 259.09,960.88 578.74,960.88 610.24,960.88 937.01,960.88 968.5,960.88 259.09,984.25 227.6,984.5 578.74,984.5 610.24,984.5 937.01,984.5 968.5,984.5 935,1348 906,1349 906,1377
  other v2: 365,1940 400,1940 435,1940 470,1940 382.5,1975 417.5,1975 452.5,1975 365,2010 400,2010 435,2010 470,2010 505,2010 347.5,2045 382.5,2045 417.5,2045 452.5,2045
VDD: C1.2 C2.2 C3.2 C4.2 C11.2 C12.2 D5.C J1.3 R1.2 R2.2 R3.2 R7.1 R11.2 R20.2 R23.1 R32.2 U1.3 U1.11 U1.22 U2.5 | length 827.6
  TOP w7: v1(830,1734) 854.72,1758.72 858,1762 R20.2@902.3,1762
  TOP w15: U2.5@231.86,1537.4 231.93,1537.47 231.93,1578.43 C4.2@232,1578.5 C11.2@272,1578.5 273,1577.5 v1(273,1556) ; v1(332,1555) C12.2@332,1578.5 332.22,1578.29 402.2,1578.29 U1.22@402.42,1578.07 ; v1(549.41,1823.36) C2.2@580.91,1823.36 580.81,1823.26 580.81,1756.46 U1.11@580.71,1756.36 ; v1(708,1853.31) C3.2@737.41,1853.31 737.5,1853.22 C1.2@737.5,1812 738.19,1811.32 U1.3@738.19,1756.36
  BOT w15: v1(346,1368) 348,1368 356.5,1376.5 R23.1@385.83,1376.5 ; v1(830,1705) 941.65,1705 1028.54,1618.11 J1.3@1070.87,1618.11
  other v2: 155,2045 190,2045 225,2045 120,2080 155,2080 190,2080 155,2115 190,2115 225,2115
VDD_UI: D5.A J4.13 J?.22 | length 87
  TOP w7: D5.A@392.77,2078.74 393.7,2079.67 J4.13@393.7,2165.35
pads on no net: J1.1 J1.2 J4.S1 J4.S2 J6.MP1 J6.MP2 J?.M1 J?.M2 U1.1 U1.4 U1.5 U1.6 U1.31 U1.32 U1.36 U1.37 U1.38 U1.39 U1.43 U1.44 U1.45 U1.49 U1.52 U1.53 U1.54
copper on no net: | length 293.6
  TOP w7: 115,1969.53 116,1970.53 v1(116,2001)
  BOT w4: 114,2045.5 115,2046.5
  BOT w7: 114,2045.5 116,2043.5 v1(116,2001) ; 115,2109.5 115,2128 123,2136 271.38,2136 297.38,2110
  other v3: -39.37,787.4 1220.47,787.4

## Polygon pours and split planes (outlines as drawn)
no net on TOP "NONET_L-01_P-001" (solid, pour order 134): 0,0 1692.91,0 1692.91,1968.5 0,1968.5
GND on TOP "NONET_L-01_P-001" (solid, pour order 133): 0,0 0,2360 1180,2360 1180,0
SENSE on TOP "SENSE_L01_P080" (solid, remove dead copper, pour order 80): 779.53,665.61 779.53,741.14 825,741.14 825,665.61 940.2,665.61 940.2,478 50.43,478 50.43,665.61 50.43,745 120,745 120,665.61
HV on TOP "HV_L01_P079" (solid, pour order 79): 215.79,661.67 215.79,575.06 259.35,531.5 424.45,531.5 424.45,661.67 310.28,661.67
OUTA on TOP "OUTA_L01_P135" (solid, pour order 135): 120,665.61 123.94,661.67 211.46,661.67 211.46,777.06 208.99,779.53 216.67,787.2 260.08,787.2 260.08,814.76 183.31,814.76 183.31,813.23 157.48,787.4 118.11,787.4
OUTA on TOP "OUTA_L01_P090" (solid, pour order 90): 162.64,940.94 272.87,940.94 272.87,803.15 320.12,803.15 320.12,885.83 416.57,885.83 416.57,677.16 320.12,677.17 320.12,759.88 295,779.53 162.64,779.53
GND on TOP "PGND_L01_P055" (solid, pour order 55): 244.09,11.81 244.09,421.26 444.88,421.26 444.88,86.61 736.22,86.61 736.22,421.26 937.01,421.26 937.01,11.81 1059.06,11.81 1059.06,476.38 645.67,476.38 535.43,476.38 122.05,476.38 122.05,11.81
VCC on TOP "NONET_L-01_P-001" (solid, pour order 132): 1005,1300 1005,1405 889.33,1405 887.92,1406.41 885,1403.48 885,1300
VCC on TOP "VCC_L01_P086" (solid, pour order 86): 1021.65,1000.25 921.26,1000.25 921.26,945.13 1021.65,945.13
OUTB on TOP "OUTB_L01_P091" (solid, pour order 91): 513.78,940.94 624.02,940.94 624.02,803.15 671.26,803.15 671.26,889.76 771.65,889.76 771.65,677.17 671.26,677.17 671.26,759.84 651.57,779.53 513.78,779.53
OUTC on TOP "OUTC_L01_P092" (solid, pour order 92): 875.98,940.94 986.22,940.94 986.22,803.15 1033.46,803.15 1033.46,889.76 1137.8,889.76 1137.8,803.15 1137.8,677.17 1033.46,677.17 1033.46,759.84 1013.78,779.53 875.98,779.53
BOOTA on TOP "BOOTA_L01_P097" (solid, pour order 97): 117.36,1023.62 156.73,1023.62 156.73,948.82 168.29,948.82 180.35,948.82 211.85,948.82 211.85,1000 270.91,1000 270.91,1074.8 117.36,1074.8
BOOTB on TOP "BOOTB_L01_P099" (solid, pour order 99): 468.5,1023.62 507.87,1023.62 507.87,948.82 519.43,948.82 531.5,948.82 562.99,948.82 562.99,1000 622.05,1000 622.05,1070.87 468.5,1070.87
BOOTC on TOP "BOOTC_L01_P101" (solid, pour order 101): 830.71,1027.56 870.08,1027.56 870.08,948.82 881.64,948.82 893.7,948.82 925.2,948.82 925.2,1000 984.25,1000 984.25,1070.87 830.71,1070.87
VDD on TOP "NONET_L-01_P-001" (solid, pour order 87): 113.64,2015 30,2076.33 30,2140 287.4,2140 287.4,2015
HV on TOP "HV_L01_P076" (solid, pour order 76): 569.68,663.85 569.68,577.24 613.24,533.68 775.59,533.68 775.59,663.85 664.16,663.85
VCC on TOP "VCC_L01_P082" (solid, pour order 82): 312.24,1000.25 211.85,1000.25 211.85,945.13 312.24,945.13
VCC on TOP "VCC_L01_P085" (solid, pour order 85): 663.39,1000.25 562.99,1000.25 562.99,945.13 663.39,945.13
HV on TOP "HV_L01_P051" (solid, pour order 51): 248.03,0 933.07,0 933.07,421.26 740.16,421.26 740.16,86.61 440.94,86.61 440.94,421.26 248.03,421.26
HV on TOP "HV_L01_P078" (solid, pour order 78): 933.66,665.61 933.66,578.99 977.22,535.43 1146.26,535.43 1146.26,665.61 1028.15,665.61
HV on POWER "NONET_L-01_P-001" (solid, pour order 60): 0,905.51 1181.1,905.51 1181.1,0 0,0
VDD on POWER "NONET_L-01_P-001" (solid, pour order 108): 859,1495 472.51,1108.51 446.77,1105 1.3,1105 0,1106.3 0,2333 3,2334 652,2334 652,2140.34 643.66,2132 342,2132 333,2141 333,1914 715,1914 857,1772 859,1772
VCC on POWER "NONET_L-01_P-001" (solid, pour order 58): 844,1484 843.6,1484 468,1108.4 468,1085 970.32,1085 970.32,1829.8 659.67,2140 320,2140 320,1910 705,1910 844,1771
HV on POWER "NONET_L-01_P-001" (solid, pour order 61): 1173.07,900 1173.07,2362.2 649.61,2362.2 649.61,2137.95 970,1836.58 970,900
VCC on POWER "NONET_L-01_P-001" (solid, pour order 59): 0,909.45 1007.87,909.45 1007.87,1106.3 0,1106.3
VCC on BOT "NONET_L-01_P-001" (solid, pour order 107): 600,1880 315,1880 315,2215 600,2215
OUTA on BOT "NONET_L-01_P-001" (solid, pour order 104): 158,883 306,883 307.09,884.09 306.79,1031.79 449,1174 1149.61,1174 1149.61,1074.8 724.41,1074.8 413.39,763.78 413.39,673.23 307.99,673.23 307.99,808.99 308,809 303,814 129,814 129,854
OUTB on BOT "NONET_L-01_P-001" (solid, pour order 103): 677.17,890 525.12,890 490,854.88 490,816.93 677.17,816.93 677.17,681.1 826.77,681.1 826.77,877.95 921.26,972.44 1149.61,972.44 1149.61,1066.93 791.34,1066.93 677.17,952.76
HV on BOT "NONET_L-01_P-001" (solid, pour order 106): 760,2215 760,1879 1095,1879 1095,2215
HV on BOT "HV_L04_P114" (solid, pour order 114): 570,600 655,600 655,525 775,525 775,690 765,700 570,700
HV on BOT "HV_L04_P115" (solid, pour order 115): 920,600 995,600 995,585 995,580 995,535 1150,535 1150,715 920,715 920,660
GND on BOT "GND_L04_P120" (solid, pour order 120): 600,2215 765,2215 765,1885 760,1880 600,1880
SENSE on BOT "NONET_L-01_P-001" (solid, pour order 125): 185,610 85,610 85,710 185,710
SENSE on BOT "NONET_L-01_P-001" (solid, pour order 129): 920,710 830,710 785,665 785,610 920,610
SENSE on BOT "NONET_L-01_P-001" (solid, pour order 127): 430,647.5 482.5,700 545,700 545,595 430,595
HV on BOT "NONET_L-01_P-001" (solid, pour order 69): 311,673 268,716 200,716.79 200,701 200,612 311,612 311,538.58 420,538.58 420,673
OUTC on BOT "NONET_L-01_P-001" (solid, pour order 102): 990,900 865,900 865,835 990,835 990,755.03 1019.94,754.3 1019.94,681.1 1149.61,681.1 1149.61,956.69 990,956.69
GND on GND "NONET_L-01_P-001" (solid, pour order 28): 0,0 0,2362.2 1181.1,2362.2 1181.1,0

## Keep-outs
Keep-Out Layer:
  the board outline again, w78.74

## Other copper
TOP:
  pour cut-out: 551.63,-125.59 551.23,-294.49 557.09,-294.49 557.09,-246.85 624.8,-246.85 624.8,-294.49 630.32,-294.49 630.32,-125.59 624.8,-125.59 624.8,-173.23 557.09,-173.23 557.09,-125.59
  pour cut-out: 551.63,504.33 551.23,335.43 557.09,335.43 557.09,383.07 624.8,383.07 624.8,335.43 630.32,335.43 630.32,504.33 624.8,504.33 624.8,456.69 557.09,456.69 557.09,504.33

## Text inside footprints (layer, text, board x,y; h text height)
U1: Top Overlay "*" at 777.4,1824.36 h50 r270; Mechanical 13 "*" at 762.4,1723.36 h50 r270